# EAGLE board Simulation (EAGLE 9.7.0)

Size 184.17 x 161.42 mm. Coordinates in mm from the lower left corner, seen from the top.
Outline: 0,0 184.17,0 184.17,161.42 0,161.42 0,0
Copper layers (1*16): Top 0.035mm / dielectric 1.5mm / Bottom 0.035mm
Design rules "default": minimum track width 6mil, minimum drill 0.35mm, track to track 6mil, track to pad 6mil, pad to pad 6mil, via to via 6mil, smd to smd 6mil, copper to edge 40mil, drill to drill 6mil, minimum pad ring 10mil, minimum via ring 8mil, stop-mask expansion 4mil, vias tented up to drill 0mil, thermal gap 10mil

## Footprints (pad centres in the part's own frame; a part is rotated, then mirrored left to right if it is on the bottom)
LEDRD254W60D565H860B_G = drill 0.981 pad 1.581: 1 -1.27,0; 2 1.27,0
LEDRD254W60D565H860B = drill 0.981 pad 1.581: 1 -1.27,0; 2 1.27,0
PIEZO = drill 1 pad 1.6: 1 -3.5,0; 2 3.5,0
RESAD1016W63L850D250B = drill 0.83 pad 1.43: 1 -5.08,0; 2 5.08,0
SWITCH-MOMENTARY-PTH-6.5MM = drill 1.016 pad 1.88: 1 -3.251,2.261; 2 3.251,2.261; 3 -3.251,-2.261; 4 3.251,-2.261
ARDUINO-UNO-R3-SHIELD = drill 1.016 pad 1.88: 3.3V 24.13,-2.54; 5V 24.13,0; A0 24.13,12.7; A1 24.13,15.24; A2 24.13,17.78; A3 24.13,20.32; A4 24.13,22.86; A5 24.13,25.4; AREF -24.13,-13.97; D2 -24.13,20.32; D3 -24.13,17.78; D4 -24.13,15.24; D5 -24.13,12.7; D6 -24.13,10.16; D7 -24.13,7.62; D8 -24.13,3.81; D9 -24.13,1.27; D10 -24.13,-1.27; D11 -24.13,-3.81; D12 -24.13,-6.35; D13 -24.13,-8.89; GND@0 24.13,2.54; GND@1 24.13,5.08; GND@2 -24.13,-11.43; IOREF 24.13,-7.62; NC 24.13,-10.16; RES 24.13,-5.08; RX -24.13,25.4; SCL -24.13,-19.05; SDA -24.13,-16.51; TX -24.13,22.86; VIN 24.13,7.62
LCD-I2C = drill 1.016 long: 1 -19.05,-5.08; 2 -19.05,-7.62; 3 -19.05,-10.16; 4 -19.05,-12.7

## Placement (x,y rotation side)
D1  GREEN  [LEDRD254W60D565H860B_G]  85.49,132.43 0 top
D2  RED  [LEDRD254W60D565H860B]  96.29,132.91 0 top
PIEZO1  PIEZO  [PIEZO]  90.43,147.84 0 top
R1  220  [RESAD1016W63L850D250B]  84.22,127.35 90 top
R2  220  [RESAD1016W63L850D250B]  95.02,127.83 90 top
SA  SWITCH_MOMENTARY  [SWITCH-MOMENTARY-PTH-6.5MM]  91.55,112.93 90 top
SB  SWITCH_MOMENTARY  [SWITCH-MOMENTARY-PTH-6.5MM]  91.45,102.29 90 top
SC  SWITCH_MOMENTARY  [SWITCH-MOMENTARY-PTH-6.5MM]  91.28,91.29 90 top
SD  SWITCH_MOMENTARY  [SWITCH-MOMENTARY-PTH-6.5MM]  91.62,79.95 90 top
SRESULT  SWITCH_MOMENTARY  [SWITCH-MOMENTARY-PTH-6.5MM]  91.86,68.42 90 top
U1  ARDUINO-UNO-R3-SHIELD  [ARDUINO-UNO-R3-SHIELD]  47.88,65.61 270 top
U2  LCD-16X2-I2CSUNFOUNDER-IIC  [LCD-I2C]  128.54,36.63 0 top

## Library data of the parts
D1 = Tinkercad; CATEGORY: Opto-Electronic; SUB-CATEGORY: LED; VALUE: LED_GREEN
D2 = Tinkercad; CATEGORY: Opto-Electronic; SUB-CATEGORY: LED; VALUE: LED_RED
PIEZO1 R1 R2 SA SB SC SD SRESULT U1 U2 = Tinkercad

## Nets
D1_A: D1.1 R1.2
D2_A: D2.1 R2.2
U1_5V: U1.5V U2.2
U1_A4: U1.A4 U2.3
U1_A5: U1.A5 U2.4
U1_D3: SA.2 U1.D3
U1_D4: SB.2 U1.D4
U1_D5: SC.2 U1.D5
U1_D6: SD.2 U1.D6
U1_D7: SRESULT.2 U1.D7
U1_D8: PIEZO1.1 U1.D8
U1_D12: R1.1 U1.D12
U1_D13: R2.1 U1.D13
U1_GND: D1.2 D2.2 PIEZO1.2 SA.3 SB.3 SC.3 SD.3 SRESULT.3 U1.GND@0 U1.GND@1 U1.GND@2 U2.1

## Tracks (layer width: path | path; a pad name or v marks a point on that pad's centre or on a via)
D1_A  (1 unrouted)
D2_A  (1 unrouted)
U1_5V  (1 unrouted)
U1_A4  (1 unrouted)
U1_A5  (1 unrouted)
U1_D3  (1 unrouted)
U1_D4  (1 unrouted)
U1_D5  (1 unrouted)
U1_D6  (1 unrouted)
U1_D7  (1 unrouted)
U1_D8  (1 unrouted)
U1_D12  (1 unrouted)
U1_D13  (1 unrouted)
U1_GND  (11 unrouted)